# Altium PCB PCB1.PcbDoc
Units mm, origin at the board's own origin, x right, y up, seen from the top; angles counter-clockwise.
Board outline 152.4 x 101.6 mm, 2 copper layers (Top Layer, Bottom Layer); 6 components, 10 nets, 61 pads, 0 vias.
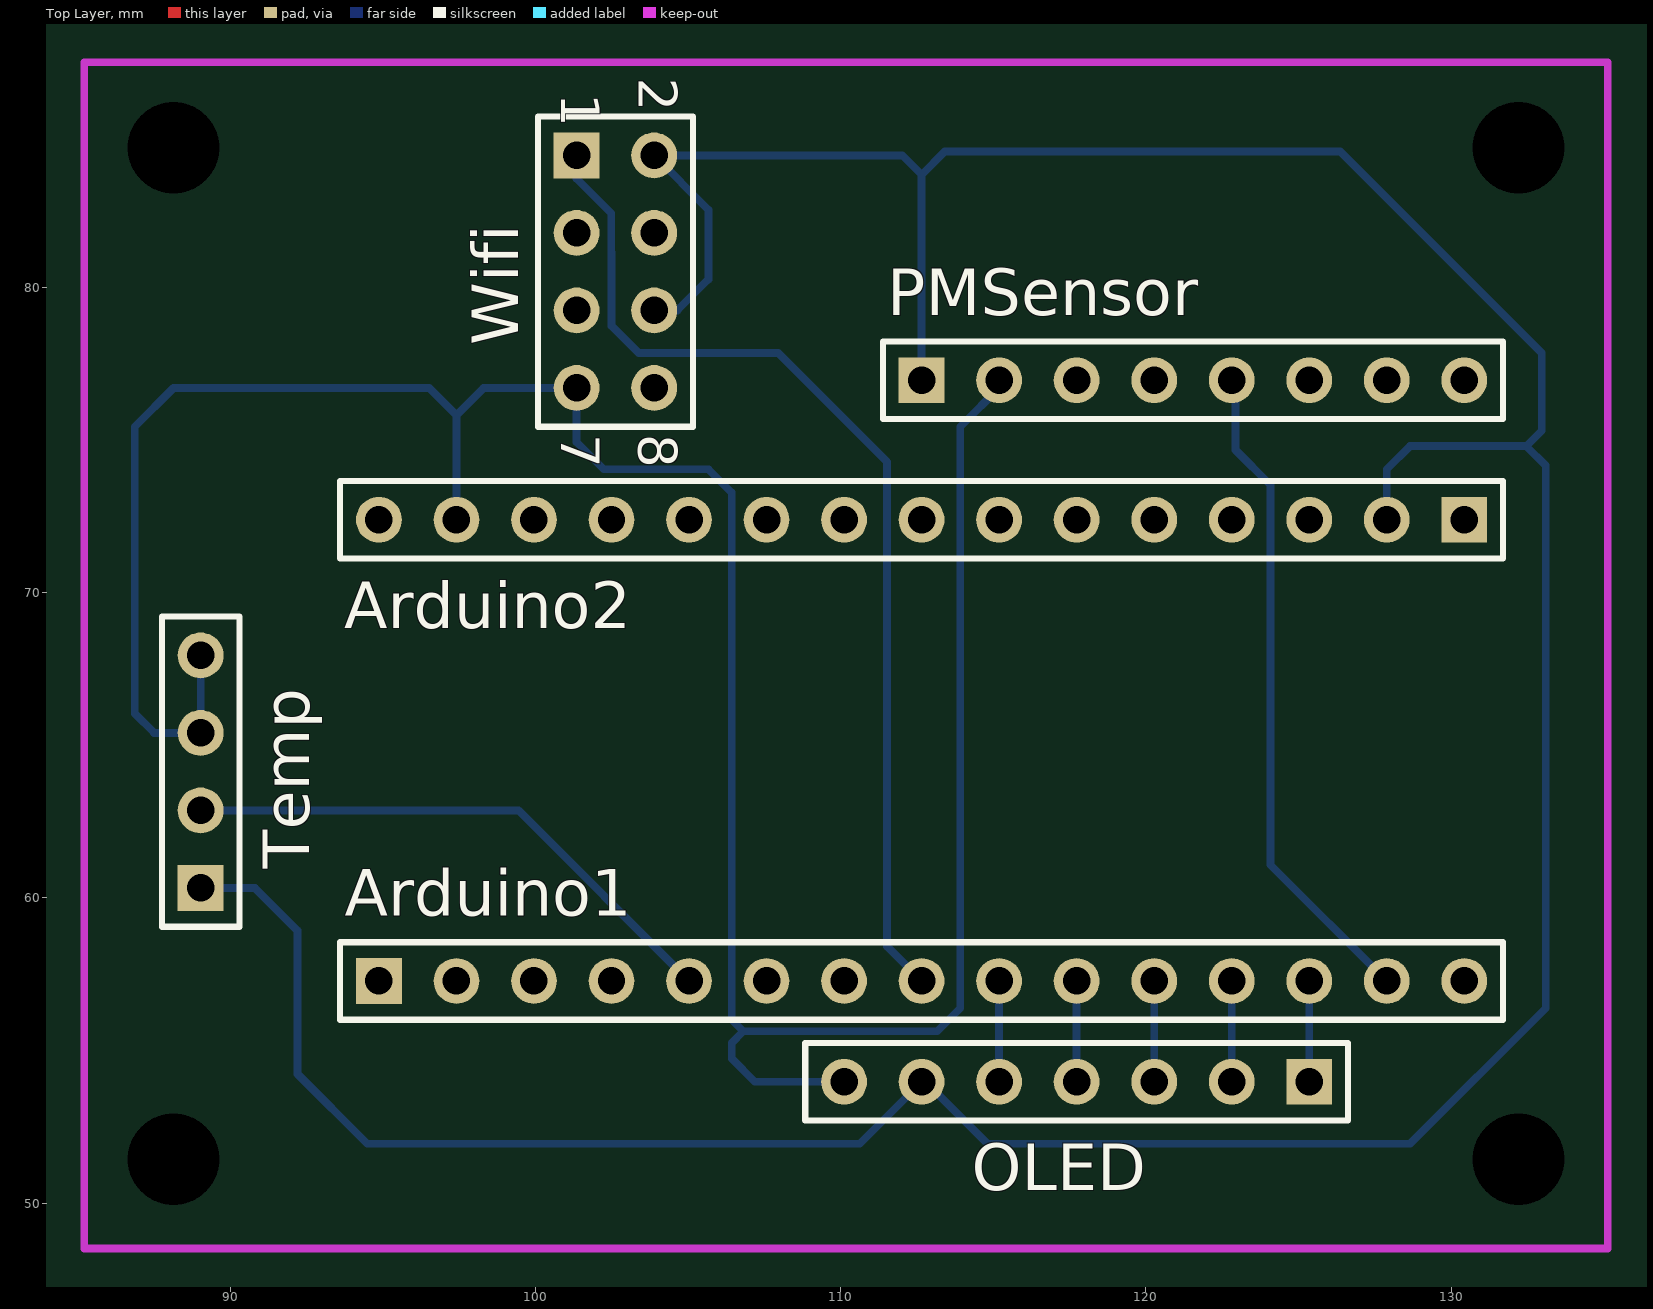
[diagram p0: Top Layer view]
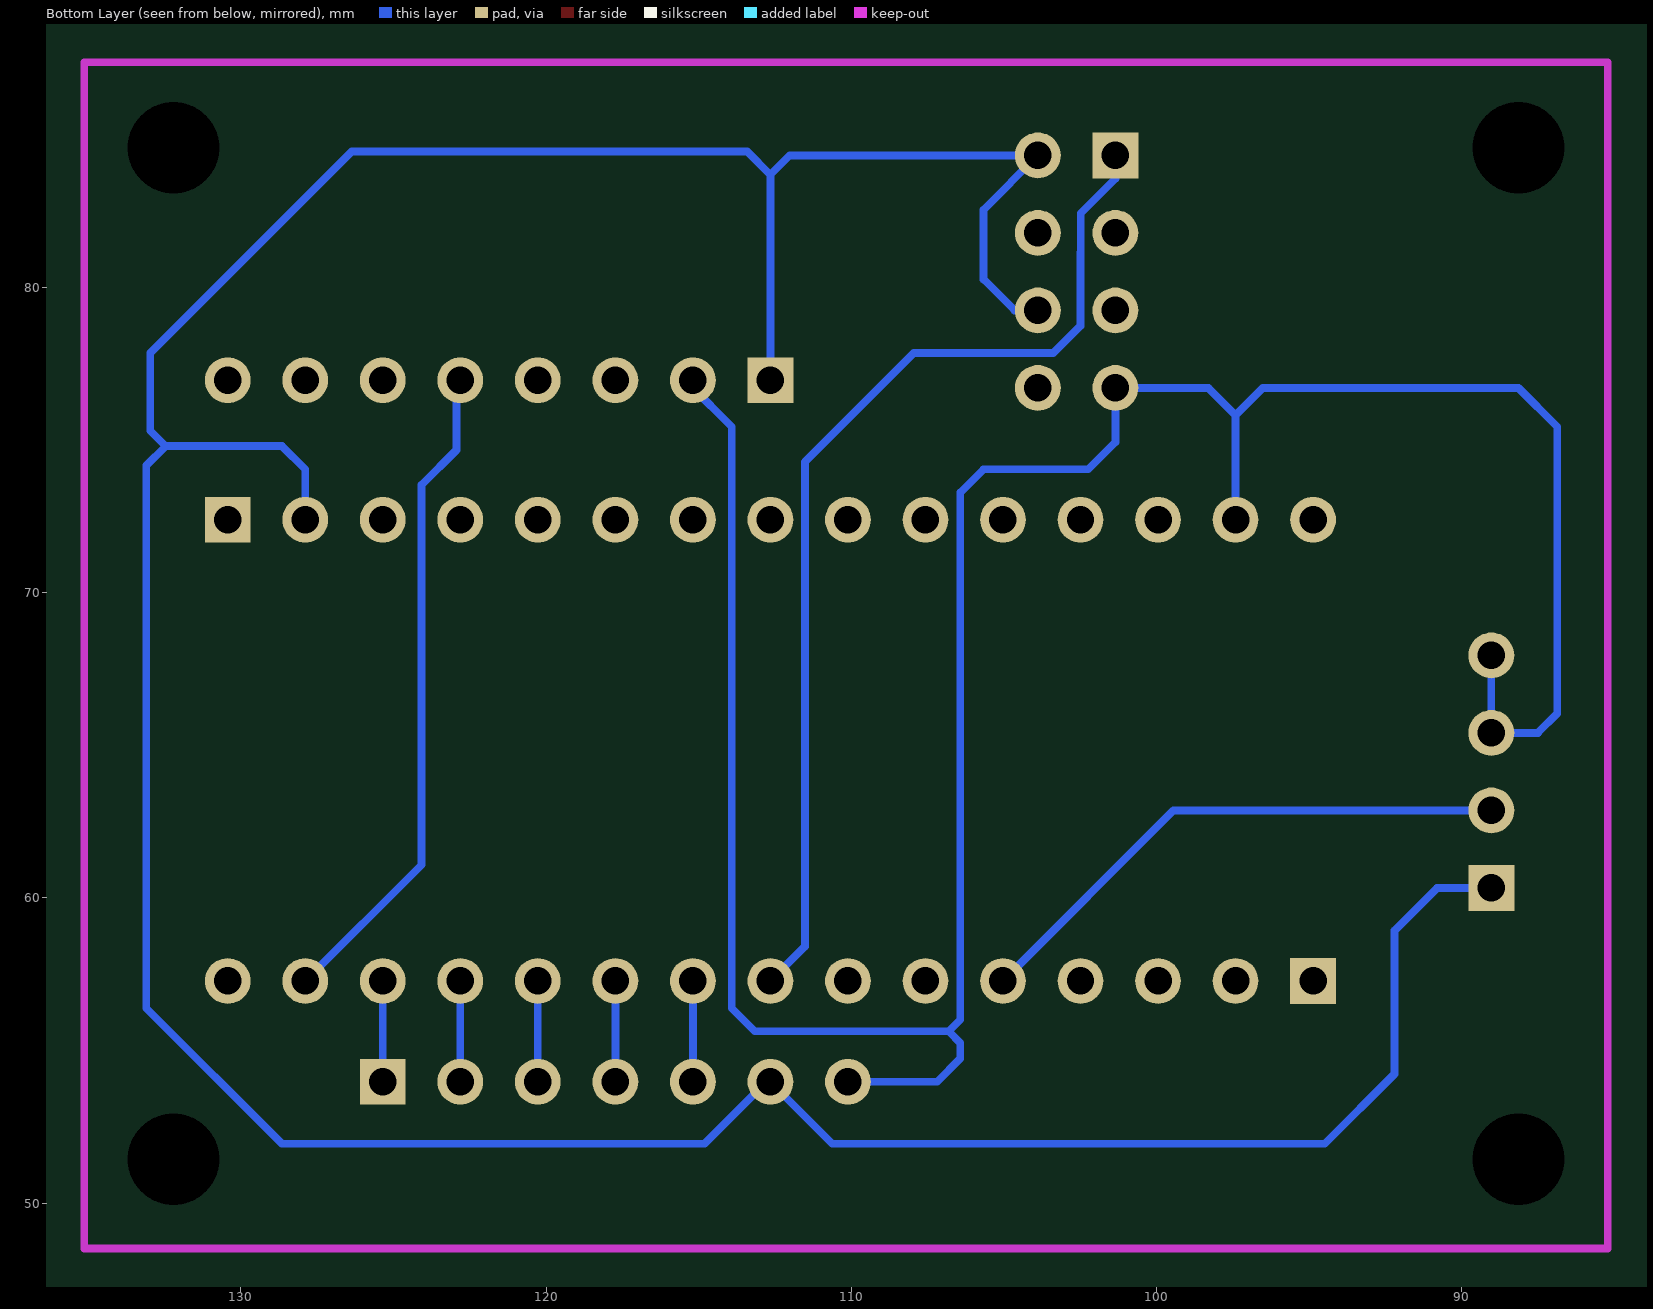
[diagram p1: Bottom Layer view, seen from below]

## Layer stack, top to bottom
Top Solder: solder mask 0.0102, Solder Resist, Dk 3.5
Top Layer: signal copper 0.0356
Dielectric 1: dielectric 0.32, FR-4, Dk 4.8
Bottom Layer: signal copper 0.0356
Bottom Solder: solder mask 0.0102, Solder Resist, Dk 3.5

## Board outline
25.4,25.4 177.8,25.4 177.8,127 25.4,127

## Design rules (kind name [scope] priority, off if disabled: settings)
Clearance [All] p1: gap=0.254
PolygonConnect [All] p1: connectstyle=Relief reliefconductorwidth=0.254 reliefentries=4 polygonreliefangle="90 Angle" airgapwidth=0.254
RoutingVias [All] p1: holewidth=0.711 width=1.27 viastyle="Through Hole" minholewidth=0.711 minwidth=1.27 maxholewidth=0.711 maxwidth=1.27
SolderMaskExpansion [All] p1: expansion=0.102
Width [All] p1: maxlimit=0.254 minlimit=0.254 preferedwidth=0.254
30 further rules are at their usual default settings.

## Classes and differential pairs
component class Sheet1: Arduino1 Arduino2 PMSensor Wifi

## Components (designator, comment, footprint, x,y, rotation, side; value= is the part's Value field where it differs from the comment)
Arduino1 "Header 15" HDR1X15 94.869,57.277 r0 top
Arduino2 "Header 15" HDR1X15 130.429,72.39 r180 top
OLED "Header 7" HDR1X7 125.349,53.975 r180 top
PMSensor "Header 8" HDR1X8 112.649,76.962 r0 top
Temp "Header 4" HDR1X4 89.027,60.325 r90 top
Wifi "Header 4X2" HDR2X4 101.346,84.328 r270 top

## Footprints (in the part's own frame and the unit in brackets; to place one, negate y for a bottom-side part, rotate by r counter-clockwise, add the part's x,y. Pads: shape width x height; smd on the part's side, far side on the other; paste and mask are expansions set on the pad)
HDR1X4 [mm] "Connector; Header; 4 Position"
  rect 1.5x1.5 hole 0.9: 1(0,0)
  round 1.5 hole 0.9: 2(2.54,0) 3(5.08,0) 4(7.62,0)
  silkscreen extent -1.27,-1.27 8.89,1.27
HDR1X7 [mm] "Connector; Header; 7 Position"
  rect 1.5x1.5 hole 0.9: 1(0,0)
  round 1.5 hole 0.9: 2(2.54,0) 3(5.08,0) 4(7.62,0) 5(10.16,0) 6(12.7,0) 7(15.24,0)
  silkscreen extent -1.27,-1.27 16.51,1.27
HDR1X8 [mm] "Connector; Header; 8 Position"
  rect 1.5x1.5 hole 0.9: 1(0,0)
  round 1.5 hole 0.9: 2(2.54,0) 3(5.08,0) 4(7.62,0) 5(10.16,0) 6(12.7,0) 7(15.24,0) 8(17.78,0)
  silkscreen extent -1.27,-1.27 19.05,1.27
HDR1X15 [mm] "Connector; Header; 15 Position"
  rect 1.5x1.5 hole 0.9: 1(0,0)
  round 1.5 hole 0.9: 2(2.54,0) 3(5.08,0) 4(7.62,0) 5(10.16,0) 6(12.7,0) 7(15.24,0) 8(17.78,0) 9(20.32,0) 10(22.86,0) 11(25.4,0) 12(27.94,0) 13(30.48,0) 14(33.02,0) 15(35.56,0)
  silkscreen extent -1.27,-1.27 36.83,1.27
HDR2X4 [mm] "Connector; Header; 4x2 Position"
  rect 1.5x1.5 hole 0.9: 1(0,0)
  round 1.5 hole 0.9: 2(0,2.54) 3(2.54,0) 4(2.54,2.54) 5(5.08,0) 6(5.08,2.54) 7(7.62,0) 8(7.62,2.54)
  silkscreen extent -1.27,-1.27 8.89,3.81

## Part data
Arduino1 Arduino2: "Header, 15-Pin"
OLED: "Header, 7-Pin"
PMSensor: "Header, 8-Pin"
Temp: "Header, 4-Pin"
Wifi: "Header, 4-Pin, Dual row"

## Free pads (board coordinates)
  round 1.524 hole 3: 6(88.138,84.582) 7(88.138,51.435) 8(132.207,84.582) 9(132.207,51.435)

## Nets (pads, with @x,y where several pads share a name; then routed paths per layer and width w, separated by ;. In a path a pad name is that pad's centre, name@x,y a point inside that pad or via, vN(x,y) a via of type N, cw(c..) or ccw(c..) an arc to the next point about the centre after c; other vN are vias at no path point)
NetArduino1_5: Arduino1.5 Temp.2 | length 18.3
  Bottom Layer w0.254: Temp.2 99.441,62.865 Arduino1.5
NetArduino1_8: Arduino1.8 Wifi.1 | length 34.7
  Bottom Layer w0.254: Wifi.1 101.346,83.566 102.477,82.435 102.477,81.165 102.489,81.153 102.489,78.74 103.378,77.851 107.95,77.851 111.518,74.283 111.518,58.408 Arduino1.8 Arduino1.8@112.649,57.531
NetArduino1_9: Arduino1.9 OLED.5 | length 3.3
  Bottom Layer w0.254: OLED.5 Arduino1.9
NetArduino1_10: Arduino1.10 OLED.4 | length 3.3
  Bottom Layer w0.254: OLED.4 Arduino1.10
NetArduino1_11: Arduino1.11 OLED.3 | length 3.3
  Bottom Layer w0.254: OLED.3 Arduino1.11
NetArduino1_12: Arduino1.12 OLED.2 | length 3.3
  Bottom Layer w0.254: OLED.2 Arduino1.12
NetArduino1_13: Arduino1.13 OLED.1 | length 3.3
  Bottom Layer w0.254: OLED.1 Arduino1.13
NetArduino1_14: Arduino1.14 PMSensor.5 | length 21.6
  Bottom Layer w0.254: PMSensor.5@122.936,76.835 122.936,74.676 124.079,73.533 124.079,61.087 Arduino1.14
NetArduino2_2: Arduino2.2 OLED.6 PMSensor.1 Temp.1 Wifi.2 Wifi.6 | length 128.7
  Bottom Layer w0.254: Temp.1 90.805,60.325 92.202,58.928 92.202,54.229 94.488,51.943 110.617,51.943 OLED.6 112.776,53.975 114.808,51.943 128.651,51.943 133.096,56.388 133.096,74.168 132.461,74.803 ; Wifi.6 104.648,79.248 105.664,80.264 105.664,82.55 Wifi.2 112.014,84.328 112.649,83.693 ; PMSensor.1@112.649,76.835 PMSensor.1 112.649,83.693 ; Arduino2.2@127.889,72.263 Arduino2.2 127.889,74.041 128.651,74.803 132.461,74.803 ; 112.649,83.693 113.411,84.455 126.365,84.455 132.969,77.851 132.969,75.311 132.461,74.803
NetArduino2_14: Arduino2.14 OLED.7 PMSensor.2 Temp.3 Temp.4 Wifi.7 | length 92.4
  Bottom Layer w0.254: Temp.4 Temp.3 87.503,65.405 86.868,66.04 86.868,75.438 88.138,76.708 96.52,76.708 97.409,75.819 ; Arduino2.14@97.409,72.263 Arduino2.14 97.409,75.819 ; OLED.7 107.188,53.975 106.426,54.737 106.426,55.245 106.807,55.626 ; PMSensor.2@115.252,76.772 113.919,75.438 113.919,56.388 113.157,55.626 106.807,55.626 ; 97.409,75.819 98.298,76.708 Wifi.7 101.346,74.93 102.235,74.041 105.664,74.041 106.426,73.279 106.426,56.007 106.807,55.626
pads on no net: Arduino1.1 Arduino1.2 Arduino1.3 Arduino1.4 Arduino1.6 Arduino1.7 Arduino1.15 Arduino2.1 Arduino2.3 Arduino2.4 Arduino2.5 Arduino2.6 Arduino2.7 Arduino2.8 Arduino2.9 Arduino2.10 Arduino2.11 Arduino2.12 Arduino2.13 Arduino2.15 PMSensor.3 PMSensor.4 PMSensor.6 PMSensor.7 PMSensor.8 Wifi.3 Wifi.4 Wifi.5 Wifi.8

## Keep-outs
Keep-Out Layer:
  lines w0.254: 85.217,48.514 135.128,48.514 135.128,87.376 85.217,87.376 85.217,48.514

## Text inside footprints (layer, text, board x,y; h text height)
Wifi: Top Overlay "2" at 103.378,86.868 h1.27 r270; Top Overlay "1" at 100.838,86.36 h1.27 r270; Top Overlay "7" at 100.838,75.184 h1.27 r270; Top Overlay "8" at 103.378,75.184 h1.27 r270